# EAGLE board Board_R2 (EAGLE 7.3.0)
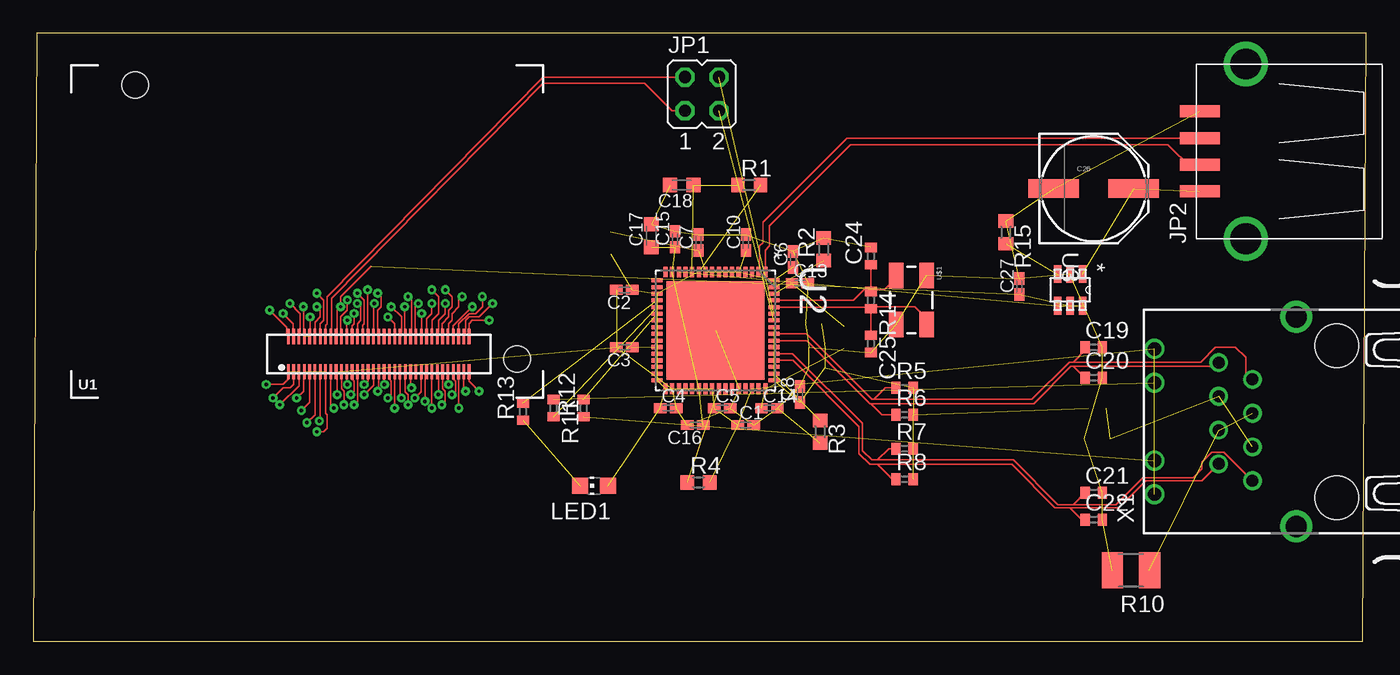
[diagram p0: board, top side]
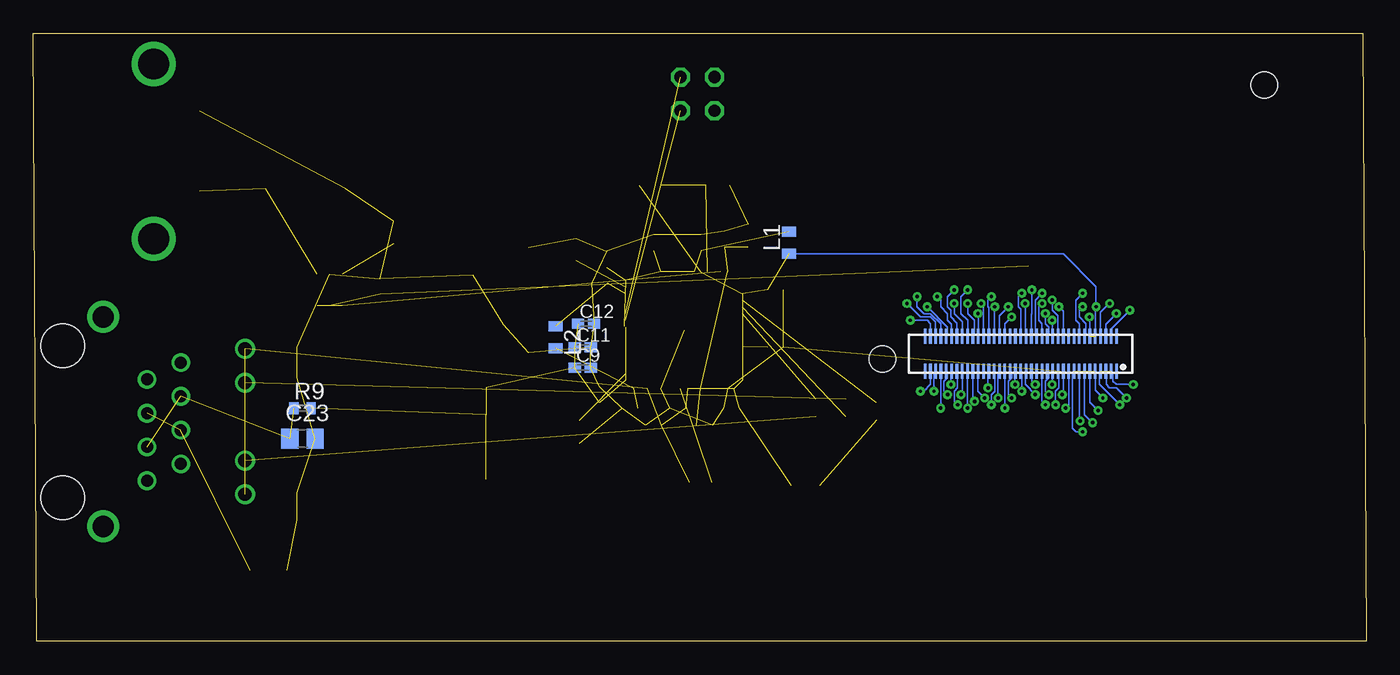
[diagram p1: board, bottom side, seen from below]

Size 100.25 x 45.71 mm. Coordinates in mm from the lower left corner, seen from the top.
Outline: 0,0 100,0 100.25,45.71 0.25,45.71 0,0
Copper layers ((1*2)*(3*16)): Top 0.035mm / dielectric 1.5mm / layer 2 0.035mm / dielectric 0.15mm / layer 3 0.035mm / dielectric 0.2mm / Bottom 0.035mm
Design rules "default *": minimum track width 10mil, minimum drill 24mil, track to track 8mil, track to pad 8mil, pad to pad 8mil, via to via 8mil, smd to smd 8mil, copper to edge 40mil, drill to drill 8mil, minimum pad ring 10mil, minimum via ring 8mil, stop-mask expansion 4mil, vias tented up to drill 0mil, thermal gap 10mil

## Footprints (pad centres in the part's own frame; a part is rotated, then mirrored left to right if it is on the bottom)
C0402K = smd 0.925 x 0.74: 1 -0.6,0; 2 0.6,0
C0603K = smd 1.05 x 1.08: 1 -0.875,0; 2 0.875,0
C0402 = smd 0.7 x 0.9: 1 -0.65,0; 2 0.65,0
C0805 = smd 1.3 x 1.5: 1 -0.95,0; 2 0.95,0
PANASONIC_E = smd 3.8 x 1.4: + 3,0; - -3,0
JP2Q = drill 0.914 octagon: 1 -1.27,-1.27; 2 1.27,-1.27; 3 -1.27,1.27; 4 1.27,1.27
USB-A-S = smd 3 x 0.9: D+ 3.45,-1; D- 3.45,1; GND 3.45,-3; VBUS 3.45,3 | drill 2.311: P$5 0,-6.566; P$6 0,6.566
L0603 = smd 0.75 x 1.05: 1 -0.825,0; 2 0.825,0
CHIP-LED0805 = smd 1.2 x 1.2: A 0,-1.05; C 0,1.05
R0603 = smd 1 x 1.1: 1 -0.85,0; 2 0.85,0
R0402 = smd 0.7 x 0.9: 1 -0.65,0; 2 0.65,0
R1210 = smd 1.6 x 2.7: 1 -1.4,0; 2 1.4,0
EDISON_DAUGHTER = smd 1.14 x 0.2: 1 1.98,19.17; 2 4.62,19.17; 3 1.98,18.77; 4 4.62,18.77; 5 1.98,18.37; 6 4.62,18.37; 7 1.98,17.97; 8 4.62,17.97; 9 1.98,17.57; 10 4.62,17.57; 11 1.98,17.17; 12 4.62,17.17; 13 1.98,16.77; 14 4.62,16.77; 15 1.98,16.37; 16 4.62,16.37; 17 1.98,15.97; 18 4.62,15.97; 19 1.98,15.57; 20 4.62,15.57; 21 1.98,15.17; 22 4.62,15.17; 23 1.98,14.77; 24 4.62,14.77; 25 1.98,14.37; 26 4.62,14.37; 27 1.98,13.97; 28 4.62,13.97; 29 1.98,13.57; 30 4.62,13.57; 31 1.98,13.17; 32 4.62,13.17; 33 1.98,12.77; 34 4.62,12.77; 35 1.98,12.37; 36 4.62,12.37; 37 1.98,11.97; 38 4.62,11.97; 39 1.98,11.57; 40 4.62,11.57; 41 1.98,11.17; 42 4.62,11.17; 43 1.98,10.77; 44 4.62,10.77; 45 1.98,10.37; 46 4.62,10.37; 47 1.98,9.97; 48 4.62,9.97; 49 1.98,9.57; 50 4.62,9.57; 51 1.98,9.17; 52 4.62,9.17; 53 1.98,8.77; 54 4.62,8.77; 55 1.98,8.37; 56 4.62,8.37; 57 1.98,7.97; 58 4.62,7.97; 59 1.98,7.57; 60 4.62,7.57; 61 1.98,7.17; 62 4.62,7.17; 63 1.98,6.77; 64 4.62,6.77; 65 1.98,6.37; 66 4.62,6.37; 67 1.98,5.97; 68 4.62,5.97; 69 1.98,5.57; 70 4.62,5.57 | hole 2: 23.53,30.67; 2.93,1.98
QFN50P900X900X100-65N = smd 0.813 x 0.305: 1 -4.394,3.759; 2 -4.394,3.251; 3 -4.394,2.743; 4 -4.394,2.261; 5 -4.394,1.753; 6 -4.394,1.245; 7 -4.394,0.762; 8 -4.394,0.254; 9 -4.394,-0.254; 10 -4.394,-0.762; 11 -4.394,-1.245; 12 -4.394,-1.753; 13 -4.394,-2.261; 14 -4.394,-2.743; 15 -4.394,-3.251; 16 -4.394,-3.759; 33 4.394,-3.759; 34 4.394,-3.251; 35 4.394,-2.743; 36 4.394,-2.261; 37 4.394,-1.753; 38 4.394,-1.245; 39 4.394,-0.762; 40 4.394,-0.254; 41 4.394,0.254; 42 4.394,0.762; 43 4.394,1.245; 44 4.394,1.753; 45 4.394,2.261; 46 4.394,2.743; 47 4.394,3.251; 48 4.394,3.759 | smd 0.305 x 0.813: 17 -3.759,-4.394; 18 -3.251,-4.394; 19 -2.743,-4.394; 20 -2.261,-4.394; 21 -1.753,-4.394; 22 -1.245,-4.394; 23 -0.762,-4.394; 24 -0.254,-4.394; 25 0.254,-4.394; 26 0.762,-4.394; 27 1.245,-4.394; 28 1.753,-4.394; 29 2.261,-4.394; 30 2.743,-4.394; 31 3.251,-4.394; 32 3.759,-4.394; 49 3.759,4.394; 50 3.251,4.394; 51 2.743,4.394; 52 2.261,4.394; 53 1.753,4.394; 54 1.245,4.394; 55 0.762,4.394; 56 0.254,4.394; 57 -0.254,4.394; 58 -0.762,4.394; 59 -1.245,4.394; 60 -1.753,4.394; 61 -2.261,4.394; 62 -2.743,4.394; 63 -3.251,4.394; 64 -3.759,4.394 | smd 7.391 x 7.391: 65 0,0
21-0058I = smd 1.321 x 0.559: 1 -1.194,0.94; 2 -1.194,0; 3 -1.194,-0.94; 4 1.194,-0.94; 5 1.194,0; 6 1.194,0.94
DF40C-70DP-0.4(51) = smd 0.2 x 1.14 bottom: 1 6.8,1.32; 2 6.8,-1.32; 3 6.4,1.32; 4 6.4,-1.32; 5 6,1.32; 6 6,-1.32; 7 5.6,1.32; 8 5.6,-1.32; 9 5.2,1.32; 10 5.2,-1.32; 11 4.8,1.32; 12 4.8,-1.32; 13 4.4,1.32; 14 4.4,-1.32; 15 4,1.32; 16 4,-1.32; 17 3.6,1.32; 18 3.6,-1.32; 19 3.2,1.32; 20 3.2,-1.32; 21 2.8,1.32; 22 2.8,-1.32; 23 2.4,1.32; 24 2.4,-1.32; 25 2,1.32; 26 2,-1.32; 27 1.6,1.32; 28 1.6,-1.32; 29 1.2,1.32; 30 1.2,-1.32; 31 0.8,1.32; 32 0.8,-1.32; 33 0.4,1.32; 34 0.4,-1.32; 35 0,1.32; 36 0,-1.32; 37 -0.4,1.32; 38 -0.4,-1.32; 39 -0.8,1.32; 40 -0.8,-1.32; 41 -1.2,1.32; 42 -1.2,-1.32; 43 -1.6,1.32; 44 -1.6,-1.32; 45 -2,1.32; 46 -2,-1.32; 47 -2.4,1.32; 48 -2.4,-1.32; 49 -2.8,1.32; 50 -2.8,-1.32; 51 -3.2,1.32; 52 -3.2,-1.32; 53 -3.6,1.32; 54 -3.6,-1.32; 55 -4,1.32; 56 -4,-1.32; 57 -4.4,1.32; 58 -4.4,-1.32; 59 -4.8,1.32; 60 -4.8,-1.32; 61 -5.2,1.32; 62 -5.2,-1.32; 63 -5.6,1.32; 64 -5.6,-1.32; 65 -6,1.32; 66 -6,-1.32; 67 -6.4,1.32; 68 -6.4,-1.32; 69 -6.8,1.32; 70 -6.8,-1.32; NC1 7.2,1.32; NC2 7.2,-1.32; NC3 -7.2,-1.32; NC4 -7.2,1.32
CRYSTAL-SMD-5X3 = smd 1.9 x 1.1: 1 -1.85,-1.15; 2 1.85,-1.15; 3 1.85,1.15; 4 -1.85,1.15
J1 = drill 0.9 pad 1.3: 1 4.445,2.54; 2 3.175,0; 3 1.905,2.54; 4 0.635,0; 5 -0.635,2.54; 6 -1.905,0; 7 -3.175,2.54; 8 -4.445,0 | drill 1 pad 1.422: 9 5.465,7.37; 10 2.925,7.37; 11 -2.925,7.37; 12 -5.465,7.37 | drill 1.6 pad 2.184: M1 -7.875,-3.3; M2 7.875,-3.3 | hole 3.3: 5.715,-6.35; -5.715,-6.35

## Placement (x,y rotation side)
C1  0.1  [C0402K]  53.59,16.26 0 top
C2  0.1  [C0402K]  44.45,26.42 180 top
C3  0.1  [C0402K]  44.45,22.1 180 top
C4  0.1  [C0402K]  47.75,17.53 0 top
C5  0.1  [C0402K]  51.82,17.53 0 top
C6  0.1  [C0402K]  57.15,28.7 90 top
C7  0.1  [C0402K]  50.04,29.97 90 top
C8  0.1  [C0402K]  57.66,18.54 90 top
C9  0.1  [C0402K]  58.93,20.57 0 bottom
C10  0.1  [C0402K]  53.59,29.97 90 top
C11  0.1  [C0402K]  58.93,22.1 0 bottom
C12  0.1  [C0402K]  58.67,23.88 0 bottom
C13  1.0  [C0402K]  57.66,26.92 0 top
C14  0.1  [C0402K]  55.37,17.53 0 top
C15  0.1  [C0402K]  48.26,30.23 90 top
C16  0.1  [C0402K]  49.78,16.26 180 top
C17  4.7  [C0603K]  46.48,30.48 90 top
C18  0.01uF  [C0603K]  48.77,34.29 180 top
C19  15pF  [C0402]  79.76,22.1 0 top
C20  15pF  [C0402]  79.76,19.81 0 top
C21  15pF  [C0402]  79.76,11.18 0 top
C22  15pF  [C0402]  79.76,9.14 0 top
C23  0.022uF  [C0805]  80.01,15.24 0 bottom
C24  33pF  [C0402]  62.99,28.96 90 top
C25  33pF  [C0402]  62.99,22.35 270 top
C26  150uF  [PANASONIC_E]  79.76,34.04 0 top
C27  1.0  [C0402K]  74.17,26.67 90 top
JP1  [JP2Q]  50.29,41.15 0 top
JP2  USB-A-S  [USB-A-S]  91.19,36.83 180 top
L1  2.0A 120Ohm  [L0603]  43.43,29.97 90 bottom
L2  2.0A 120Ohm  [L0603]  60.96,22.86 270 bottom
LED1  Green LED  [CHIP-LED0805]  42.16,11.68 90 top
R1  10K  [R0603]  53.85,34.29 0 top
R2  12K  [R0603]  59.44,29.46 90 top
R3  12.4K  [R0603]  59.18,15.75 270 top
R4  10K  [R0603]  50.04,11.94 0 top
R5  49.9  [R0402]  65.53,19.05 0 top
R6  49.9  [R0402]  65.53,17.02 0 top
R7  49.9  [R0402]  65.53,14.48 0 top
R8  49.9  [R0402]  65.53,12.19 0 top
R9  10  [R0402]  80.01,17.53 0 bottom
R10  0  [R1210]  82.55,5.33 180 top
R11  330  [R0402]  39.12,17.53 270 top
R12  330  [R0402]  41.4,17.53 90 top
R13  330  [R0402]  36.83,17.27 90 top
R14  1M  [R0402]  62.99,25.65 270 top
R15  56k  [R0603]  73.15,30.73 270 top
U1  EDISON_CONNECTOR_FULLMOUNTING_HOLES  [EDISON_DAUGHTER]  38.35,18.29 90 top
U2  LAN9512-JZX  [QFN50P900X900X100-65N]  51.31,23.37 270 top
U3  MAX4995AAUT+  [21-0058I]  77.98,26.42 270 top
U4  EDISON_CONNECTOR_FULLHEADER  [DF40C-70DP-0.4(51)]  25.98,21.62 180 top
U$1  25MHz  [CRYSTAL-SMD-5X3]  66.04,25.65 270 top
X1  J1011F01P  [J1]  91.69,16.51 90 top

## Library data of the parts
C1-C22 C24 C25 C27 R15 = rcl
C23 R1-R14 = resistor
C26 = SparkFun-Capacitors
JP1 = jumper
JP2 = SparkFun-Connectors
L1 L2 = murata-inductors
LED1 = led
U1 U4 = Edison
U2 = Lan9512; MPN: LAN9512-JZX; OC_FARNELL: 2292586; OC_NEWARK: 66W1988; PACKAGE: 64VQFN; SUPPLIER: Microchip
U3 = MAX4995; MANUFACTURER_PART_NUMBER: max4995aaut+; VENDOR: MAXIM
U$1 = SparkFun-FreqCtrl
X1 = con-pulse; OC_FARNELL: unknown; OC_NEWARK: unknown

## Nets
+3V3: C1.1 C2.1 C3.1 C4.1 C5.1 L1.1 LED1.A R1.2 R4.2 U1.8 U1.10 U2.11 U2.19 U2.27 U2.28 U2.29 U2.30 U2.32 U2.33 U2.39 U2.40 U2.46 U4.8 U4.10 X1.9 X1.12
CHASSGND: R10.1 X1.4 X1.5
DSUSB_N: JP2.D- U2.1
DSUSB_P: JP2.D+ U2.2
GND: C1.2 C2.2 C3.2 C4.2 C5.2 C6.2 C7.2 C8.2 C9.2 C10.2 C11.2 C12.2 C13.2 C14.2 C15.2 C16.2 C17.2 C18.2 C19.2 C20.2 C21.2 C22.2 C23.2 C24.2 C25.2 C26.- C27.2 JP2.GND R2.2 R3.2 R10.2 R15.1 U1.1 U1.5 U1.9 U1.11 U1.13 U1.15 U2.34 U2.44 U2.65 U3.2 U4.1 U4.5 U4.9 U4.11 U4.13 U4.15 U$1.2 U$1.4
N$1: C13.1 L2.1 U2.62
N$2: C14.1 L2.2 U2.48
N$3: U2.16
N$4: C15.1 C16.1 C17.1 U2.15 U2.38
N$6: R2.1 U2.63
N$7: C18.1 R1.1 U2.12
N$8: R3.1 U2.50
N$9: R4.1 U2.41
N$10: C23.1 R9.1 X1.3 X1.6
N$15: R11.2 U2.21
N$16: R11.1 X1.10
N$17: R12.1 X1.11
N$18: R12.2 U2.22
N$19: LED1.C R13.1
N$20: R13.2 U2.20
N$21: C24.1 R14.1 U2.61 U$1.1
N$22: C25.1 R14.2 U2.60 U$1.3
N$23: U2.14 U3.4 U3.6
N$25: C26.+ JP2.VBUS U3.1
N$26: R15.2 U3.3
P2: U1.2 U4.2
P3: U1.3 U4.3
P4: U1.4 U4.4
P6: U1.6 U4.6
P7: U1.7 U4.7
P12: U1.12 U4.12
P14: U1.14 U4.14
P17: U1.17 U4.17
P19: U1.19 U4.19
P21: U1.21 U4.21
P22: U1.22 U4.22
P23: U1.23 U4.23
P24: U1.24 U4.24
P25: U1.25 U4.25
P26: U1.26 U4.26
P27: U1.27 U4.27
P28: U1.28 U4.28
P30: U1.30 U4.30
P31: U1.31 U4.31
P32: U1.32 U4.32
P33: U1.33 U4.33
P34: U1.34 U4.34
P35: U1.35 U4.35
P36: U1.36 U4.36
P37: U1.37 U4.37
P39: U1.39 U4.39
P41: U1.41 U4.41
P42: U1.42 U4.42
P43: U1.43 U4.43
P44: U1.44 U4.44
P45: U1.45 U4.45
P46: U1.46 U4.46
P47: U1.47 U4.47
P48: U1.48 U4.48
P50: U1.50 U4.50
P51: U1.51 U4.51
P52: U1.52 U4.52
P53: U1.53 U4.53
P54: U1.54 U4.54
P55: U1.55 U4.55
P56: U1.56 U4.56
P57: U1.57 U4.57
P58: U1.58 U4.58
P59: U1.59 U4.59
P60: U1.60 U4.60
P61: U1.61 U4.61
P62: U1.62 U4.62
P63: U1.63 U4.63
P64: U1.64 U4.64
P65: U1.65 U4.65
P66: U1.66 U4.66
P67: U1.67 U4.67
P68: U1.68 U4.68
P69: U1.69 U4.69
P70: U1.70 U4.70
RX_N: C22.1 R8.1 U2.52 X1.7
RX_P: C21.1 R7.1 U2.53 X1.8
TX_N: C19.1 R5.1 U2.56 X1.2
TX_P: C20.1 R6.1 U2.55 X1.1
USB_VBUS: C27.1 U1.20 U3.5 U4.20
USBUP: JP1.3 U1.16 U4.16
USBUP2: JP1.1 U1.18 U4.18
USBUPDN: JP1.2 U2.58
USBUPDP: JP1.4 U2.59
VDD33A: C6.1 C7.1 C8.1 C9.1 C10.1 C11.1 C12.1 L1.2 R5.2 R6.2 R7.2 R8.2 R9.2 U2.5 U2.10 U2.49 U2.51 U2.54 U2.57 U2.64

## Tracks (layer width: path | path; a pad name or v marks a point on that pad's centre or on a via)
+3V3  (via drill 0.25 pad 0.13)  (22 unrouted)
  Top 0.127: v20.32,25.15 20.32,22.97 U1.8 | v20.83,24.38 20.83,22.95 U1.10
  Bottom 0.127: U4.8 20.38,25.08 v20.32,25.15 20.32,26.67 22.8,29.15 L1.1 | U4.10 20.78,24.34 v20.83,24.38
CHASSGND  (2 unrouted)
DSUSB_N
  Top 0.127: U2.1 55.07,29.41 55.37,29.72 55.37,31.24 61.47,37.34 85.34,37.34 87.12,35.56 87.47,35.56 JP2.D-
DSUSB_P
  Top 0.127: JP2.D+ 61.2,37.83 54.86,31.5 54.86,29.97 54.61,29.72 54.61,27.81 U2.2
GND  (via drill 0.25 pad 0.13)  (43 unrouted)
  Top 0.127: U1.1 19.18,19.69 18.8,19.3 v17.53,19.3 | U1.5 19.98,19.22 v18.54,17.78 | U1.9 20.78,17.96 v20.17,17.35 | U1.11 21.18,17.04 v20.57,16.43 | U1.13 21.58,16.63 v21.51,16.56 | U1.15 21.98,17.13 22.1,17.02 22.1,16 21.84,15.75 v21.34,15.75
  Bottom 0.127: v17.53,19.3 18.8,19.3 19.05,19.56 19.05,20.16 U4.1 | v18.54,17.78 20.07,19.3 20.07,20.21 U4.5 | v20.17,17.35 20.17,17.37 20.78,17.98 U4.9 | v20.57,16.43 20.6,16.43 21.18,17.02 U4.11 | U4.11 | v21.51,16.56 21.59,16.64 U4.13 | v21.34,15.75 21.84,15.75 22.1,16 22.1,20.18 U4.15
N$1  (2 unrouted)
N$2  (2 unrouted)
N$4  (4 unrouted)
N$6  (1 unrouted)
N$7  (2 unrouted)
N$8  (1 unrouted)
N$9  (1 unrouted)
N$10  (3 unrouted)
N$15  (1 unrouted)
N$16  (1 unrouted)
N$17  (1 unrouted)
N$18  (1 unrouted)
N$19  (1 unrouted)
N$20  (1 unrouted)
N$21
  Top 0.127: U2.61 61.7,25.63 62.48,26.42 62.88,26.42 R14.1 | C24.1 R14.1 | U$1.1 64.89,27.3 64.01,26.42 63.1,26.42 R14.1
N$22
  Top 0.127: U2.60 62.88,25.12 R14.2 | C25.1 R14.2 | U$1.3 67.19,24.25 66.29,25.15 63.13,25.15 R14.2
N$23  (2 unrouted)
N$25  (2 unrouted)
N$26  (1 unrouted)
P2  (via drill 0.25 pad 0.13)
  Top 0.127: v17.78,24.89 19.05,23.62 19.05,23.04 U1.2
  Bottom 0.127: U4.2 19.18,23.49 v17.78,24.89
P3  (via drill 0.25 pad 0.13)
  Top 0.127: U1.3 19.58,19.33 19.3,19.05 18.8,19.05 v18.03,18.29
  Bottom 0.127: v18.03,18.29 18.8,19.05 19.3,19.05 19.56,19.3 19.56,20.27 U4.3
P4  (via drill 0.25 pad 0.13)
  Top 0.127: v18.8,24.64 19.56,23.88 19.56,22.93 U1.4
  Bottom 0.127: U4.4 19.58,23.85 v18.8,24.64
P6  (via drill 0.25 pad 0.13)
  Top 0.127: v19.3,25.4 20.07,24.64 20.07,22.99 U1.6
  Bottom 0.127: U4.6 19.98,24.72 v19.3,25.4
P7  (via drill 0.25 pad 0.13)
  Top 0.127: v19.81,18.29 20.32,18.8 20.32,20.2 U1.7
  Bottom 0.127: U4.7 20.38,18.86 v19.81,18.29
P12  (via drill 0.25 pad 0.13)
  Top 0.127: U1.12 21.18,23.98 21.59,24.38 21.59,24.89 v21.34,25.15
  Bottom 0.127: v21.34,25.15 21.59,24.89 21.59,24.38 21.08,23.88 21.08,23.04 U4.12
P14  (via drill 0.25 pad 0.13)
  Top 0.127: v21.34,26.16 21.84,25.65 21.84,24.13 21.59,23.88 U1.14
  Bottom 0.127: U4.14 21.58,23.87 21.84,24.13 21.84,25.65 v21.34,26.16
P17  (via drill 0.25 pad 0.13)
  Top 0.127: v22.61,17.53 22.35,17.78 22.35,20.24 U1.17
  Bottom 0.127: U4.17 22.38,17.75 v22.61,17.53
P19  (via drill 0.25 pad 0.13)
  Top 0.127: v22.86,18.54 22.86,20.19 U1.19
  Bottom 0.127: U4.19 22.78,18.62 v22.86,18.54
P21  (via drill 0.25 pad 0.13)
  Top 0.127: U1.21 23.18,18.98 23.37,18.8 v23.37,17.78
  Bottom 0.127: v23.37,17.78 23.37,18.8 23.11,19.05 23.11,20.22 U4.21
P22  (via drill 0.25 pad 0.13)
  Top 0.127: v23.62,25.65 23.62,24.89 23.11,24.38 23.11,22.98 U1.22
  Bottom 0.127: U4.22 23.18,24.45 23.62,24.89 v23.62,25.65
P23  (via drill 0.25 pad 0.13)
  Top 0.127: U1.23 23.58,19.34 v23.62,19.3
  Bottom 0.127: v23.62,19.3 23.62,20.26 U4.23
P24  (via drill 0.25 pad 0.13)
  Top 0.127: U1.24 23.58,24.09 v23.62,24.13
  Bottom 0.127: v23.62,24.13 23.62,22.97 U4.24
P25  (via drill 0.25 pad 0.13)
  Top 0.127: U1.25 23.98,19.7 24.13,19.56 24.13,18.8 v23.88,18.54
  Bottom 0.127: v23.88,18.54 24.13,18.8 24.13,19.56 23.88,19.81 23.88,20.19 U4.25
P26  (via drill 0.25 pad 0.13)
  Top 0.127: U1.26 23.98,23.73 24.13,23.88 v24.13,24.64
  Bottom 0.127: v24.13,24.64 24.13,23.88 23.88,23.62 23.88,23.04 U4.26
P27  (via drill 0.25 pad 0.13)
  Top 0.127: U1.27 24.38,18.03 v24.13,17.78
  Bottom 0.127: v24.13,17.78 24.38,18.03 U4.27 | U4.27
P28  (via drill 0.25 pad 0.13)
  Top 0.127: v24.38,25.4 24.64,25.15 24.64,24.13 24.38,23.88 U1.28
  Bottom 0.127: U4.28 24.38,23.88 24.64,24.13 24.64,25.15 v24.38,25.4
P30  (via drill 0.25 pad 0.13)
  Top 0.127: U1.30 24.78,23.77 24.89,23.88 24.89,25.65 v24.38,26.16
  Bottom 0.127: v24.38,26.16 24.89,25.65 24.89,23.04 U4.30
P31  (via drill 0.25 pad 0.13)
  Top 0.127: U1.31 25.18,19.6 v24.89,19.3
  Bottom 0.127: v24.89,19.3 25.15,19.56 25.15,20.26 U4.31
P32  (via drill 0.25 pad 0.13)
  Top 0.127: v25.15,26.42 25.15,22.95 U1.32
  Bottom 0.127: U4.32 25.18,24.6 25.15,24.64 v25.15,26.42
P33  (via drill 0.25 pad 0.13)
  Top 0.127: U1.33 25.58,19.23 v24.89,18.54
  Bottom 0.127: v24.89,18.54 25.65,19.3 25.65,20.23 U4.33
P34  (via drill 0.25 pad 0.13)
  Top 0.127: U1.34 25.58,25.33 v25.65,25.4
  Bottom 0.127: v25.65,25.4 25.65,23 U4.34
P35  (via drill 0.25 pad 0.13)
  Top 0.127: U1.35 25.98,18.87 v25.91,18.8
  Bottom 0.127: v25.91,18.8 25.91,20.22 U4.35
P36  (via drill 0.25 pad 0.13)
  Top 0.127: v25.91,26.16 26.16,25.91 26.16,25.15 25.91,24.89 25.91,22.98 U1.36
  Bottom 0.127: U4.36 25.98,24.97 26.16,25.15 26.16,25.91 v25.91,26.16
P37  (via drill 0.25 pad 0.13)
  Top 0.127: U1.37 26.38,19.34 v26.42,19.3
  Bottom 0.127: v26.42,19.3 26.42,20.26 U4.37
P39  (via drill 0.25 pad 0.13)
  Top 0.127: U1.39 26.78,19.7 26.92,19.56 26.92,18.54 v26.67,18.29
  Bottom 0.127: v26.67,18.29 26.92,18.54 26.92,19.56 26.67,19.81 26.67,20.18 U4.39
P41  (via drill 0.25 pad 0.13)
  Top 0.127: U1.41 v27.18,17.53
  Bottom 0.127: v27.18,17.53 U4.41
P42  (via drill 0.25 pad 0.13)
  Top 0.127: v26.67,24.38 27.18,23.88 U1.42
  Bottom 0.127: U4.42 27.18,23.87 v26.67,24.38
P43  (via drill 0.25 pad 0.13)
  Top 0.127: U1.43 27.58,18.39 v27.69,18.29
  Bottom 0.127: v27.69,18.29 27.69,20.19 U4.43
P44  (via drill 0.25 pad 0.13)
  Top 0.127: v26.92,25.15 27.69,24.38 27.69,23.01 U1.44
  Bottom 0.127: U4.44 27.58,24.49 v26.92,25.15
P45  (via drill 0.25 pad 0.13)
  Top 0.127: U1.45 27.98,18.75 28.19,18.54 v28.19,17.78
  Bottom 0.127: v28.19,17.78 28.19,18.54 27.94,18.8 27.94,20.25 U4.45
P46  (via drill 0.25 pad 0.13)
  Top 0.127: v27.94,25.15 27.94,22.95 U1.46
  Bottom 0.127: U4.46 27.98,25.1 v27.94,25.15
P47  (via drill 0.25 pad 0.13)
  Top 0.127: U1.47 28.38,19.11 v28.45,19.05
  Bottom 0.127: v28.45,19.05 28.45,20.23 U4.47
P48  (via drill 0.25 pad 0.13)
  Top 0.127: v28.19,25.91 28.45,25.65 28.45,22.97 U1.48
  Bottom 0.127: U4.48 28.38,25.08 28.45,25.15 28.45,25.65 v28.19,25.91
P50  (via drill 0.25 pad 0.13)
  Top 0.127: v28.96,25.4 28.7,25.15 28.7,22.99 U1.50
  Bottom 0.127: U4.50 28.78,25.23 v28.96,25.4
P51  (via drill 0.25 pad 0.13)
  Top 0.127: U1.51 29.18,18.77 v28.7,18.29
  Bottom 0.127: v28.7,18.29 29.21,18.8 29.21,20.27 U4.51
P52  (via drill 0.25 pad 0.13)
  Top 0.127: v29.21,24.64 29.21,22.93 U1.52
  Bottom 0.127: U4.52 29.18,24.61 v29.21,24.64
P53  (via drill 0.25 pad 0.13)
  Top 0.127: v29.46,18.03 29.46,20.15 U1.53
  Bottom 0.127: U4.53 29.58,18.15 v29.46,18.03
P54  (via drill 0.25 pad 0.13)
  Top 0.127: U1.54 29.58,24.25 29.97,24.64 v29.97,25.4
  Bottom 0.127: v29.97,25.4 29.97,24.64 29.46,24.13 29.46,23.06 U4.54
P55  (via drill 0.25 pad 0.13)
  Top 0.127: v29.97,17.53 29.97,20.26 U1.55
  Bottom 0.127: U4.55 29.98,17.54 v29.97,17.53
P56  (via drill 0.25 pad 0.13)
  Top 0.127: U1.56 29.98,24.14 30.48,24.64 30.48,25.91 v29.97,26.42
  Bottom 0.127: v29.97,26.42 30.48,25.91 30.48,24.64 29.97,24.13 29.97,22.95 U4.56
P57  (via drill 0.25 pad 0.13)
  Top 0.127: v30.48,18.54 30.48,20.17 U1.57
  Bottom 0.127: U4.57 30.38,18.64 v30.48,18.54
P58  (via drill 0.25 pad 0.13)
  Top 0.127: v30.99,25.4 30.99,24.64 30.48,24.13 30.48,23 U1.58
  Bottom 0.127: U4.58 30.38,24.03 30.99,24.64 v30.99,25.4
P59  (via drill 0.25 pad 0.13)
  Top 0.127: U1.59 30.78,19 30.99,18.8 30.99,18.03 v30.73,17.78
  Bottom 0.127: v30.73,17.78 30.99,18.03 30.99,18.8 30.73,19.05 30.73,20.24 U4.59
P60  (via drill 0.25 pad 0.13)
  Top 0.127: v30.99,26.42 31.5,25.91 31.5,25.15 31.24,24.89 31.24,24.38 30.73,23.88 30.73,22.96 U1.60
  Bottom 0.127: U4.60 30.78,23.93 31.24,24.38 31.24,24.89 31.5,25.15 31.5,25.91 v30.99,26.42
P61  (via drill 0.25 pad 0.13)
  Top 0.127: U1.61 31.18,19.62 31.24,19.56 v31.24,19.3
  Bottom 0.127: v31.24,19.3 31.24,20.24 U4.61
P62  (via drill 0.25 pad 0.13)
  Top 0.127: v32.26,25.91 32,25.65 32,25.15 31.5,24.64 31.5,24.13 31.24,23.88 31.24,22.97 U1.62
  Bottom 0.127: U4.62 31.18,23.82 31.5,24.13 31.5,24.64 32,25.15 32,25.65 v32.26,25.91
P63  (via drill 0.25 pad 0.13)
  Top 0.127: U1.63 31.58,19.72 31.75,19.56 31.75,18.8 v31.5,18.54
  Bottom 0.127: v31.5,18.54 31.75,18.8 31.75,19.56 31.5,19.81 31.5,20.21 U4.63
P64  (via drill 0.25 pad 0.13)
  Top 0.127: U1.64 31.58,23.71 v33.02,25.15
  Bottom 0.127: v33.02,25.15 31.5,23.62 31.5,23.02 U4.64
P65  (via drill 0.25 pad 0.13)
  Top 0.127: U1.65 31.98,17.55 v32,17.53
  Bottom 0.127: v32,17.53 32,20.28 U4.65
P66  (via drill 0.25 pad 0.13)
  Top 0.127: v33.78,25.91 33.78,25.15 33.27,24.64 32.77,24.64 32,23.88 32,22.93 U1.66
  Bottom 0.127: U4.66 31.98,23.86 32.77,24.64 33.27,24.64 33.78,25.15 v33.78,25.91
P67  (via drill 0.25 pad 0.13)
  Top 0.127: U1.67 32.38,18.92 v32.51,18.8
  Bottom 0.127: v32.51,18.8 32.51,20.17 U4.67
P68  (via drill 0.25 pad 0.13)
  Top 0.127: v34.54,25.4 33.53,24.38 32.77,24.38 32.51,24.13 32.51,23.04 U1.68
  Bottom 0.127: U4.68 32.38,24 32.77,24.38 33.53,24.38 v34.54,25.4
P69  (via drill 0.25 pad 0.13)
  Top 0.127: U1.69 32.78,19.54 v33.53,18.8
  Bottom 0.127: v33.53,18.8 33.27,18.8 32.77,19.3 32.77,20.28 U4.69
P70  (via drill 0.25 pad 0.13)
  Top 0.127: v34.29,24.13 33.02,24.13 32.77,23.88 32.77,22.93 U1.70
  Bottom 0.127: U4.70 32.78,23.86 32.77,23.88 33.02,24.13 v34.29,24.13
RX_N
  Top 0.127: U2.52 57.15,21.11 62.11,16.14 62.11,14.11 62.92,13.3 63.5,13.3 | 63.5,13.3 73.59,13.3 76.84,10.04 77.98,10.04 | 77.98,10.04 81.65,10.04 83.68,12.08 87.89,12.08 X1.7 | C22.1 78.88,9.14 77.98,10.04 | R8.1 64.6,12.19 63.5,13.3
RX_P
  Top 0.127: U2.53 57.1,21.61 62.35,16.37 62.35,14.34 63.06,13.63 63.5,13.63 | 63.5,13.63 73.73,13.63 77.08,10.28 78.23,10.28 | 78.23,10.28 81.42,10.28 83.45,12.31 87.24,12.31 87.88,12.95 87.88,13.46 88.65,14.22 89.53,14.22 X1.8 | C21.1 79.11,11.15 78.23,10.28 | R7.1 64.35,14.48 63.5,13.63
TX_N
  Top 0.127: U2.56 58.15,23.11 63.06,18.2 63.25,18.2 | 63.25,18.2 75.12,18.2 77.91,20.99 78.23,20.99 | 78.23,20.99 87.8,20.99 88.9,22.1 90.42,22.1 91.19,21.34 91.19,20.19 X1.2 | C19.1 79.11,21.87 78.23,20.99 | R5.1 64.1,19.05 63.25,18.2
TX_P
  Top 0.127: U2.55 58.19,22.61 62.92,17.87 62.99,17.87 | 62.99,17.87 75.25,17.87 78.05,20.66 78.23,20.66 | 78.23,20.66 88.86,20.66 X1.1 | C20.1 79.08,19.81 78.23,20.66 | R6.1 63.84,17.02 62.99,17.87
USB_VBUS  (via drill 0.25 pad 0.13)  (2 unrouted)
  Top 0.127: 22.86,23.11 22.86,22.98 U1.20 22.78,23.04 22.86,23.11 | 22.86,23.11 22.86,24.89 v23.11,25.15 23.11,25.91 25.4,28.19
  Bottom 0.127: U4.20 22.78,24.82 v23.11,25.15
USBUP  (1 unrouted)
  Top 0.127: JP1.3 38.35,42.42 22.1,25.91 22.1,23.85 22,23.75 22,22.92 U1.16
USBUP2  (1 unrouted)
  Top 0.127: JP1.1 48.06,39.88 45.97,41.96 38.35,41.96 22.43,25.78 22.43,22.95 U1.18
USBUPDN  (1 unrouted)
USBUPDP  (1 unrouted)
VDD33A  (19 unrouted)
  Top 0.127: U2.57 55.75,23.62 55.8,23.67